# EAGLE board CT_schematic (EAGLE 7.6.0)

Size 100 x 80 mm. Coordinates in mm from the lower left corner, seen from the top.
Outline: 0,0 100,0 100,80 0,80 0,0
Copper layers (1*16): Top 0.035mm / dielectric 1.5mm / Bottom 0.035mm
Design rules "default": minimum track width 10mil, minimum drill 24mil, track to track 8mil, track to pad 8mil, pad to pad 8mil, via to via 8mil, smd to smd 8mil, copper to edge 40mil, drill to drill 8mil, minimum pad ring 10mil, minimum via ring 8mil, stop-mask expansion 4mil, vias tented up to drill 0mil, thermal gap 10mil

## Footprints (pad centres in the part's own frame; a part is rotated, then mirrored left to right if it is on the bottom)
C0603 = smd 0.8 x 0.8: 1 -0.762,0; 2 0.762,0
C0402 = smd 0.5 x 0.5: 1 -0.508,0; 2 0.508,0
C0805 = smd 1.2 x 1.3: 1 -1.016,0; 2 1.016,0
C1210 = smd 1.2 x 2.5: 1 -1.524,0; 2 1.524,0
C1206 = smd 1.3 x 1.6: 1 -1.524,0; 2 1.524,0
L0603 = smd 0.8 x 0.8: 1 -0.762,0; 2 0.762,0
DR1040 = smd 1.6 x 3.2: 1 -4.458,0; 2 4.458,0
R0603 = smd 0.8 x 0.8: 1 -0.762,0; 2 0.762,0
LQFP64 = smd 0.3 x 1.2: 1 -3.75,-5.75; 2 -3.25,-5.75; 3 -2.75,-5.75; 4 -2.25,-5.75; 5 -1.75,-5.75; 6 -1.25,-5.75; 7 -0.75,-5.75; 8 -0.25,-5.75; 9 0.25,-5.75; 10 0.75,-5.75; 11 1.25,-5.75; 12 1.75,-5.75; 13 2.25,-5.75; 14 2.75,-5.75; 15 3.25,-5.75; 16 3.75,-5.75; 33 3.75,5.75; 34 3.25,5.75; 35 2.75,5.75; 36 2.25,5.75; 37 1.75,5.75; 38 1.25,5.75; 39 0.75,5.75; 40 0.25,5.75; 41 -0.25,5.75; 42 -0.75,5.75; 43 -1.25,5.75; 44 -1.75,5.75; 45 -2.25,5.75; 46 -2.75,5.75; 47 -3.25,5.75; 48 -3.75,5.75 | smd 1.2 x 0.3: 17 5.75,-3.75; 18 5.75,-3.25; 19 5.75,-2.75; 20 5.75,-2.25; 21 5.75,-1.75; 22 5.75,-1.25; 23 5.75,-0.75; 24 5.75,-0.25; 25 5.75,0.25; 26 5.75,0.75; 27 5.75,1.25; 28 5.75,1.75; 29 5.75,2.25; 30 5.75,2.75; 31 5.75,3.25; 32 5.75,3.75; 49 -5.75,3.75; 50 -5.75,3.25; 51 -5.75,2.75; 52 -5.75,2.25; 53 -5.75,1.75; 54 -5.75,1.25; 55 -5.75,0.75; 56 -5.75,0.25; 57 -5.75,-0.25; 58 -5.75,-0.75; 59 -5.75,-1.25; 60 -5.75,-1.75; 61 -5.75,-2.25; 62 -5.75,-2.75; 63 -5.75,-3.25; 64 -5.75,-3.75
SI7034-A10-IM = smd 0.75 x 0.4: 1 -1,0.5; 2 -1,-0.5; 4 1,-0.5; 5 1,0.5 | smd 0.8 x 1.7: 3 0,0
SMD-8 = smd 0.72 x 0.6: 1 -1.45,-0.7; 2 -0.485,-0.7; 3 0.485,-0.7; 4 1.455,-0.7; 5 1.455,0.7; 6 0.485,0.7; 7 -0.485,0.7; 8 -1.455,0.7
FCI_10118193-0001LF = smd 0.4 x 1.35: 1 -1.3,2.675; 2 -0.65,2.675; 3 0,2.675; 4 0.65,2.675; 5 1.3,2.675 | smd 1.6 x 1.4: 6 -3.2,2.45; 7 3.2,2.45 | smd 1.9 x 1.9: 8 -1.2,0; 9 1.2,0 | hole 0.5: -3.3,0; 3.3,0
SOT143B = smd 1 x 0.7: 1 -0.75,-1 | smd 0.6 x 0.7: 2 0.95,-1; 3 0.95,1; 4 -0.95,1
ABS07-32.768KHZ-7-T = smd 1.1 x 2.4: 1 -2.5,0; 2 0,0
ABLS-25.000MHZ-B2F-T = smd 5.6 x 2.8: 1 -3.81,0; 2 5.69,0
TSOT-23-5 = smd 1.3 x 0.62: 1 -1.31,0.95; 2 -1.31,0; 3 -1.31,-0.95; 4 1.31,-0.95; 5 1.31,0.95
SOIC-8_EP = smd 1.6 x 0.533: 1 -2.921,1.905; 2 -2.921,0.635; 3 -2.921,-0.635; 4 -2.921,-1.905; 5 2.921,-1.905; 6 2.921,-0.635; 7 2.921,0.635; 8 2.921,1.905 | smd 2.54 x 3.302: EPAD 0,0 | drill 0.406 pad 0.406: P$1 -0.508,0.635; P$2 0.381,0.635; P$3 -0.508,-0.635; P$4 0.381,-0.635
DFN8_2X3MC = smd 0.813 x 0.305: 1 -1.398,0.75; 2 -1.398,0.25; 3 -1.398,-0.25; 4 -1.398,-0.75; 5 1.398,-0.75; 6 1.398,-0.25; 7 1.398,0.25; 8 1.398,0.75 | smd 1.753 x 1.549: 9 0,0
JST-2-SMD = smd 1 x 4.6: 1 -1,-3.7; 2 1,-3.7 | smd 1.6 x 3.4: NC1 -3.4,1.5; NC2 3.4,1.5
SON-6 = smd 0.55 x 0.3: 1 -0.355,0.5 | smd 0.52 x 0.3: 2 -0.37,0; 3 -0.37,-0.5; 4 0.37,-0.5; 5 0.37,0; 6 0.37,0.5
DCU0008A_N = smd 0.5 x 0.3: 1 -1.6,0.75; 2 -1.6,0.25; 3 -1.6,-0.25; 4 -1.6,-0.75; 5 1.6,-0.75; 6 1.6,-0.25; 7 1.6,0.25; 8 1.6,0.75
SW_4-1437565-2 = smd 1.4 x 2.1: 1 -2.23,4.55; 2 -2.23,-4.55; 3 2.23,4.55; 4 2.23,-4.55
LGM67K-G1J2-24-Z = smd 0.8 x 1.4: A -2,0; C 0,0
NC7SZ125M5X = smd 1.3 x 0.7: 1 -1.3,0.95; 2 -1.3,0; 3 -1.3,-0.95; 4 1.3,-0.95; 5 1.3,0.95
DUMMY_PACKAGE_139 = drill 0.3: 1 0,-1; 2 1.5,-1; 3 3,-1

## Placement (x,y rotation side)
C1  1e-07  [C0603]  -38.1,46.99 0 top  (outside the outline)
C2  1e-07  [C0603]  -41.91,46.99 0 top  (outside the outline)
C3  1e-07  [C0603]  -45.72,46.99 0 top  (outside the outline)
C4  1e-07  [C0603]  -49.53,46.99 0 top  (outside the outline)
C5  4.7e-06  [C0603]  -34.29,46.99 0 top  (outside the outline)
C6  1e-07  [C0603]  -53.34,46.99 0 top  (outside the outline)
C7  1e-08  [C0603]  -57.15,46.99 0 top  (outside the outline)
C8  1e-06  [C0603]  -60.96,46.99 0 top  (outside the outline)
C9  1e-11  [C0402]  -53.34,52.07 0 top  (outside the outline)
C10  1e-11  [C0402]  -57.15,52.07 0 top  (outside the outline)
C11  1e-11  [C0402]  -60.96,52.07 0 top  (outside the outline)
C12  1e-11  [C0402]  -15.24,57.15 0 top  (outside the outline)
C13  1e-07  [C0402]  -19.05,57.15 0 top  (outside the outline)
C14  1e-06  [C0603]  -15.24,52.07 0 top  (outside the outline)
C15  1e-06  [C0603]  -19.05,52.07 0 top  (outside the outline)
C16  1e-05  [C0805]  -59.69,34.29 0 top  (outside the outline)
C17  1e-05  [C0805]  -15.24,41.91 0 top  (outside the outline)
C18  1e-05  [C1210]  -57.15,27.94 0 top  (outside the outline)
C19  1e-05  [C1210]  -16.51,35.56 0 top  (outside the outline)
C20  1e-05  [C1210]  -22.86,35.56 0 top  (outside the outline)
C21  1e-05  [C1210]  -29.21,35.56 0 top  (outside the outline)
C22  1e-07  [C0402]  -22.86,57.15 0 top  (outside the outline)
C23  1e-05  [C1206]  -35.56,35.56 0 top  (outside the outline)
C24  1e-05  [C1206]  -41.91,35.56 0 top  (outside the outline)
C25  1e-08  [C0402]  -26.67,57.15 0 top  (outside the outline)
C26  1e-07  [C0402]  -30.48,57.15 0 top  (outside the outline)
C27  1e-08  [C0402]  -34.29,57.15 0 top  (outside the outline)
C28  1e-07  [C0402]  -38.1,57.15 0 top  (outside the outline)
C29  1e-08  [C0402]  -41.91,57.15 0 top  (outside the outline)
F1  240.0  [L0603]  -22.86,52.07 0 top  (outside the outline)
I1  5.2e-06  [DR1040]  -55.88,6.35 0 top  (outside the outline)
R2  1000.0  [R0603]  -26.67,52.07 0 top  (outside the outline)
R4  4700.0  [R0603]  -30.48,52.07 0 top  (outside the outline)
R5  2200.0  [R0603]  -34.29,52.07 0 top  (outside the outline)
R6  2200.0  [R0603]  -38.1,52.07 0 top  (outside the outline)
R9  10000.0  [R0603]  -53.34,40.64 0 top  (outside the outline)
R10  10000.0  [R0603]  -58.42,40.64 0 top  (outside the outline)
R11  490000.0  [R0603]  -33.02,40.64 0 top  (outside the outline)
R12  1000000.0  [R0603]  -27.94,40.64 0 top  (outside the outline)
R13  3600.0  [R0603]  -41.91,52.07 0 top  (outside the outline)
R14  2200.0  [R0603]  -45.72,52.07 0 top  (outside the outline)
R15  10000.0  [R0603]  -15.24,46.99 0 top  (outside the outline)
R16  10000.0  [R0603]  -20.32,46.99 0 top  (outside the outline)
R17  82000.0  [R0603]  -25.4,46.99 0 top  (outside the outline)
R18  300000.0  [R0603]  -38.1,40.64 0 top  (outside the outline)
R19  120000.0  [R0603]  -43.18,40.64 0 top  (outside the outline)
R20  2000.0  [R0603]  -49.53,52.07 0 top  (outside the outline)
R21  10000.0  [R0603]  -30.48,46.99 0 top  (outside the outline)
R22  200000.0  [R0603]  -48.26,40.64 0 top  (outside the outline)
U1  STM32L152RBT6  [LQFP64]  -24.13,7.62 0 top  (outside the outline)
U2  Si7034-A10-IM  [SI7034-A10-IM]  -30.48,60.96 0 top  (outside the outline)
U3  TMD27711  [SMD-8]  -54.61,35.56 0 top  (outside the outline)
U4  10118193-0001LF  [FCI_10118193-0001LF]  -34.29,17.78 0 top  (outside the outline)
U5  prtr5v0u2ax  [SOT143B]  -54.61,57.15 0 top  (outside the outline)
U6  ABS07-32.768KHZ-7-T  [ABS07-32.768KHZ-7-T]  -27.94,27.94 0 top  (outside the outline)
U7  ABLS-25.000MHZ-B2F-T  [ABLS-25.000MHZ-B2F-T]  -53.34,17.78 0 top  (outside the outline)
U8  ltc3406es5  [TSOT-23-5]  -20.32,40.64 0 top  (outside the outline)
U9  MIC5234YME  [SOIC-8_EP]  -36.83,27.94 0 top  (outside the outline)
U10  MCP73831T-2ACI/MC  [DFN8_2X3MC]  -40.64,60.96 0 top  (outside the outline)
U11  S2B-PH-SM4-TB(LF)(SN)  [JST-2-SMD]  -22.86,20.32 0 top  (outside the outline)
U12  TPS3895ADRYR  [SON-6]  -34.29,60.96 0 top  (outside the outline)
U13  LSF0102DCTR  [DCU0008A_N]  -24.13,60.96 0 top  (outside the outline)
U14  4-1437565-2  [SW_4-1437565-2]  -45.72,6.35 0 top  (outside the outline)
U15  Q65110A2395  [LGM67K-G1J2-24-Z]  -45.72,27.94 0 top  (outside the outline)
U16  nc7sz125m5x  [NC7SZ125M5X]  -46.99,34.29 0 top  (outside the outline)
U17  Dummy  [DUMMY_PACKAGE_139]  -60.96,57.15 0 top  (outside the outline)

## Library data of the parts
C1-C29 F1 I1 R2 R4-R6 R9-R22 U1-U17 = circuit_tree

## Nets
CLK_CRYSTAL_U1_3: C9.1 U1.3 U6.1
CLK_CRYSTAL_U1_4: C10.1 U1.4 U6.2
CLK_CRYSTAL_U1_5: C11.1 U1.5 U7.1
CLK_CRYSTAL_U1_6: C12.1 U1.6 U7.2
GND: C1.2 C2.2 C3.2 C4.2 C5.2 C6.2 C7.2 C8.2 C9.2 C10.2 C11.2 C12.2 C13.2 C14.2 C15.2 C16.2 C17.1 C17.2 C18.2 C19.2 C20.2 C21.2 C22.2 C23.2 C24.2 C25.2 C26.2 C27.2 C28.2 C29.2 R2.2 R9.2 R11.2 R14.2 R17.2 R19.2 R20.2 U1.12 U1.18 U1.31 U1.47 U1.63 U2.5 U3.3 U4.5 U4.6 U4.7 U4.8 U4.9 U5.1 U8.2 U9.7 U9.EPAD U10.6 U10.9 U11.2 U12.2 U13.1 U15.C U16.1 U16.3 U17.1
INPUT_USBPOWER_5V: C23.1 R21.2 U4.1 U5.4 U10.1 U10.2
NET_U1_1: C6.1 U1.1
NET_U1_7: R4.1 U1.7 U16.4
NET_U1_13: C7.1 C8.1 F1.1 U1.13
NET_U1_29: U13.4
NET_U1_30: U13.3
NET_U1_58: R5.1 U1.58 U2.2
NET_U1_59: R6.1 U1.59 U2.4
NET_U1_60: R9.1 U1.60
NET_U1_61: U15.A
NET_U1_62: U14.3 U14.4
NET_U3_5: U3.5
NET_U3_6: U3.6
NET_U3_7: R10.1 U3.7
NET_U8_1: U8.1
NET_U8_3: I1.1 U8.3
NET_U8_5: R11.1 R12.1 U8.5
NET_U8_ATNET_3: I1.2 R12.2
NET_U9_4: R13.2 R14.1 U9.4
NET_U10_5: R21.1 U10.5
NET_U10_8: R20.1 U10.8
NET_U12_1: R16.1 R17.1 U12.1
NET_U12_3: R18.2 R19.1 U12.3
NET_U12_4: R15.1 U12.4 U16.2
NET_U13_8: R22.1 U13.8
NET_U14_1: R2.1 U14.1 U14.2
PROC_I2C2_SCL_TOXCVR: U3.2 U13.5
PROC_I2C2_SDA_TOXCVR: U3.8 U13.6
PROC_PC0: U1.8 U17.3
PROC_PC13_WKUP2: U1.2 U17.2
PROC_USB_DM: U1.44 U4.2 U5.3
PROC_USB_DP: U1.45 U4.3 U5.2
VCC_S1_3V7: C16.1 C18.1 C19.1 C24.1 U8.4 U9.5 U9.8 U10.3 U10.4 U11.1
VCC_TIER1_1V8: C1.1 C2.1 C3.1 C4.1 C5.1 C13.1 C17.2 C22.1 C27.1 C28.1 C29.1 F1.2 I1.2 R4.2 R5.2 R6.2 R12.2 R15.2 R16.2 R18.1 U1.19 U1.32 U1.48 U1.64 U2.1 U12.6 U13.2 U16.5
VCC_TIER1_3V0: C14.1 C15.1 C20.1 C21.1 C25.1 C26.1 R10.2 R13.1 R22.2 U3.1 U3.4 U9.1 U13.7

## Tracks (layer width: path | path; a pad name or v marks a point on that pad's centre or on a via)
CLK_CRYSTAL_U1_3  (2 unrouted)
CLK_CRYSTAL_U1_4  (2 unrouted)
CLK_CRYSTAL_U1_5  (2 unrouted)
CLK_CRYSTAL_U1_6  (2 unrouted)
GND  (61 unrouted)
INPUT_USBPOWER_5V  (5 unrouted)
NET_U1_1  (1 unrouted)
NET_U1_7  (2 unrouted)
NET_U1_13  (3 unrouted)
NET_U1_58  (2 unrouted)
NET_U1_59  (2 unrouted)
NET_U1_60  (1 unrouted)
NET_U1_62  (1 unrouted)
NET_U3_7  (1 unrouted)
NET_U8_3  (1 unrouted)
NET_U8_5  (2 unrouted)
NET_U8_ATNET_3  (1 unrouted)
NET_U9_4  (2 unrouted)
NET_U10_5  (1 unrouted)
NET_U10_8  (1 unrouted)
NET_U12_1  (2 unrouted)
NET_U12_3  (2 unrouted)
NET_U12_4  (2 unrouted)
NET_U13_8  (1 unrouted)
NET_U14_1  (2 unrouted)
PROC_I2C2_SCL_TOXCVR  (1 unrouted)
PROC_I2C2_SDA_TOXCVR  (1 unrouted)
PROC_PC0  (1 unrouted)
PROC_PC13_WKUP2  (1 unrouted)
PROC_USB_DM  (2 unrouted)
PROC_USB_DP  (2 unrouted)
VCC_S1_3V7  (9 unrouted)
VCC_TIER1_1V8  (27 unrouted)
VCC_TIER1_3V0  (12 unrouted)